# Allegro board VA73120_CPTest_Borad_v1.0_20221226_0800.brd
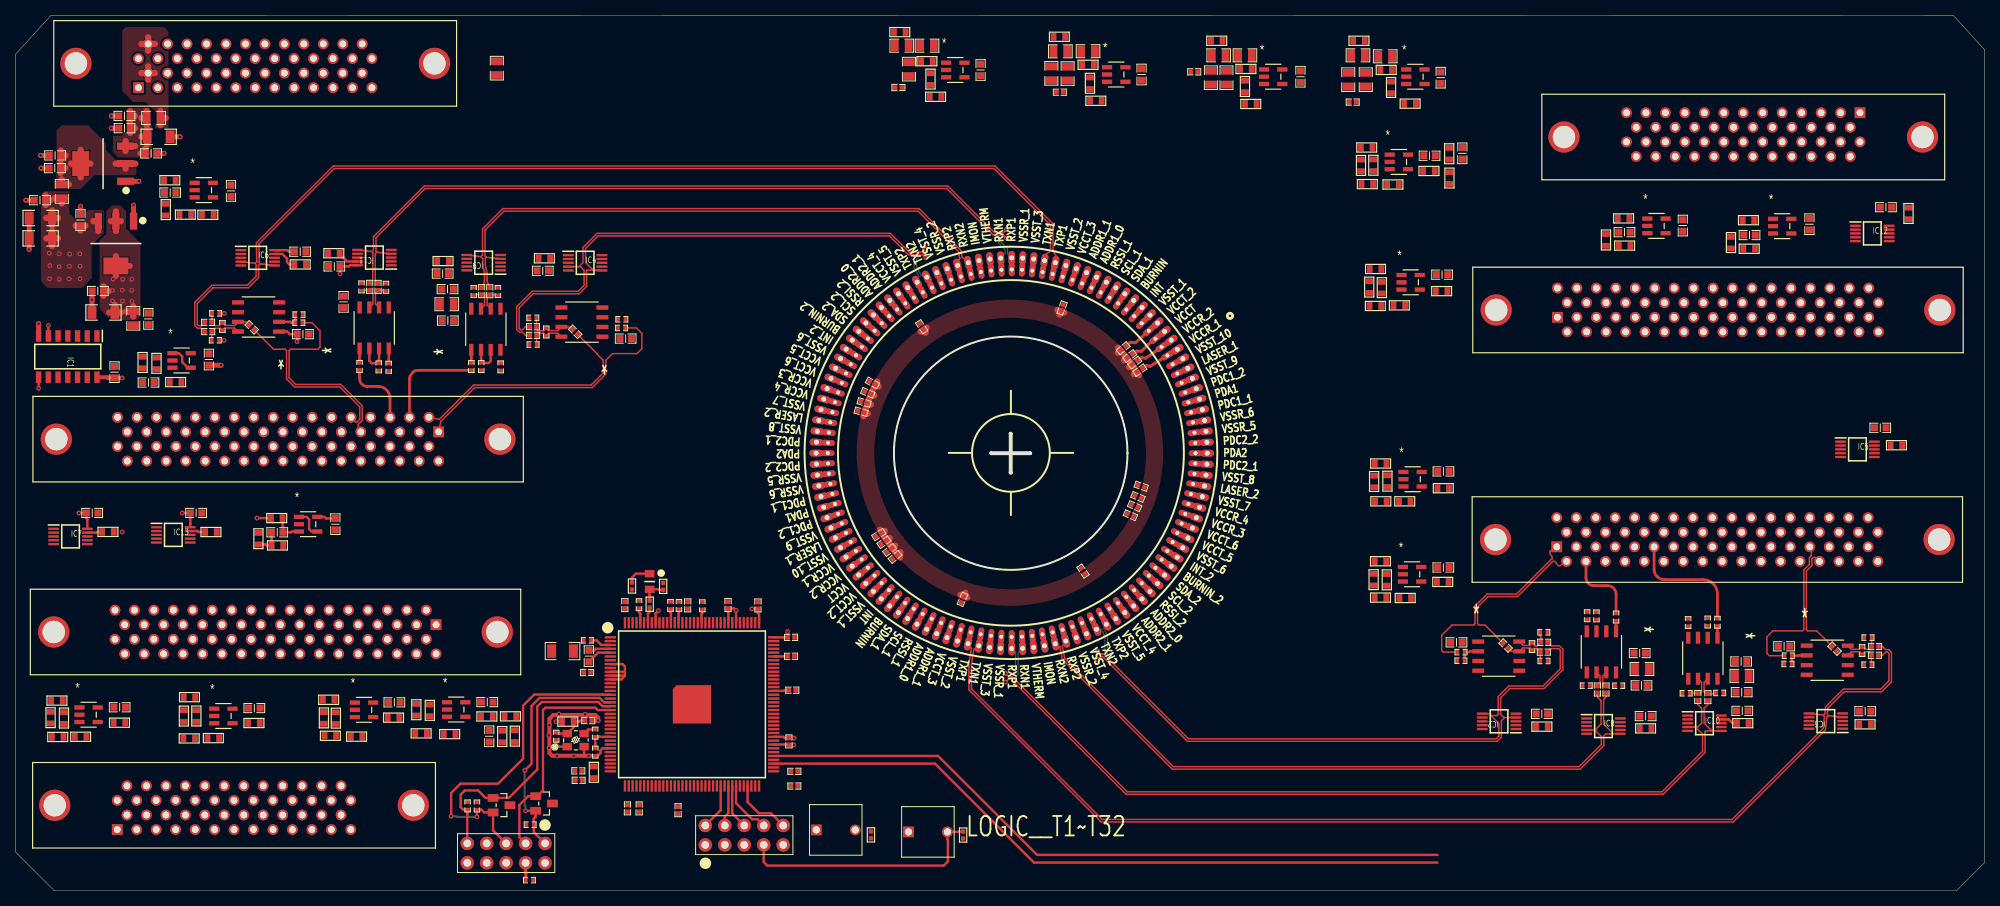
[diagram p0: board, top side]
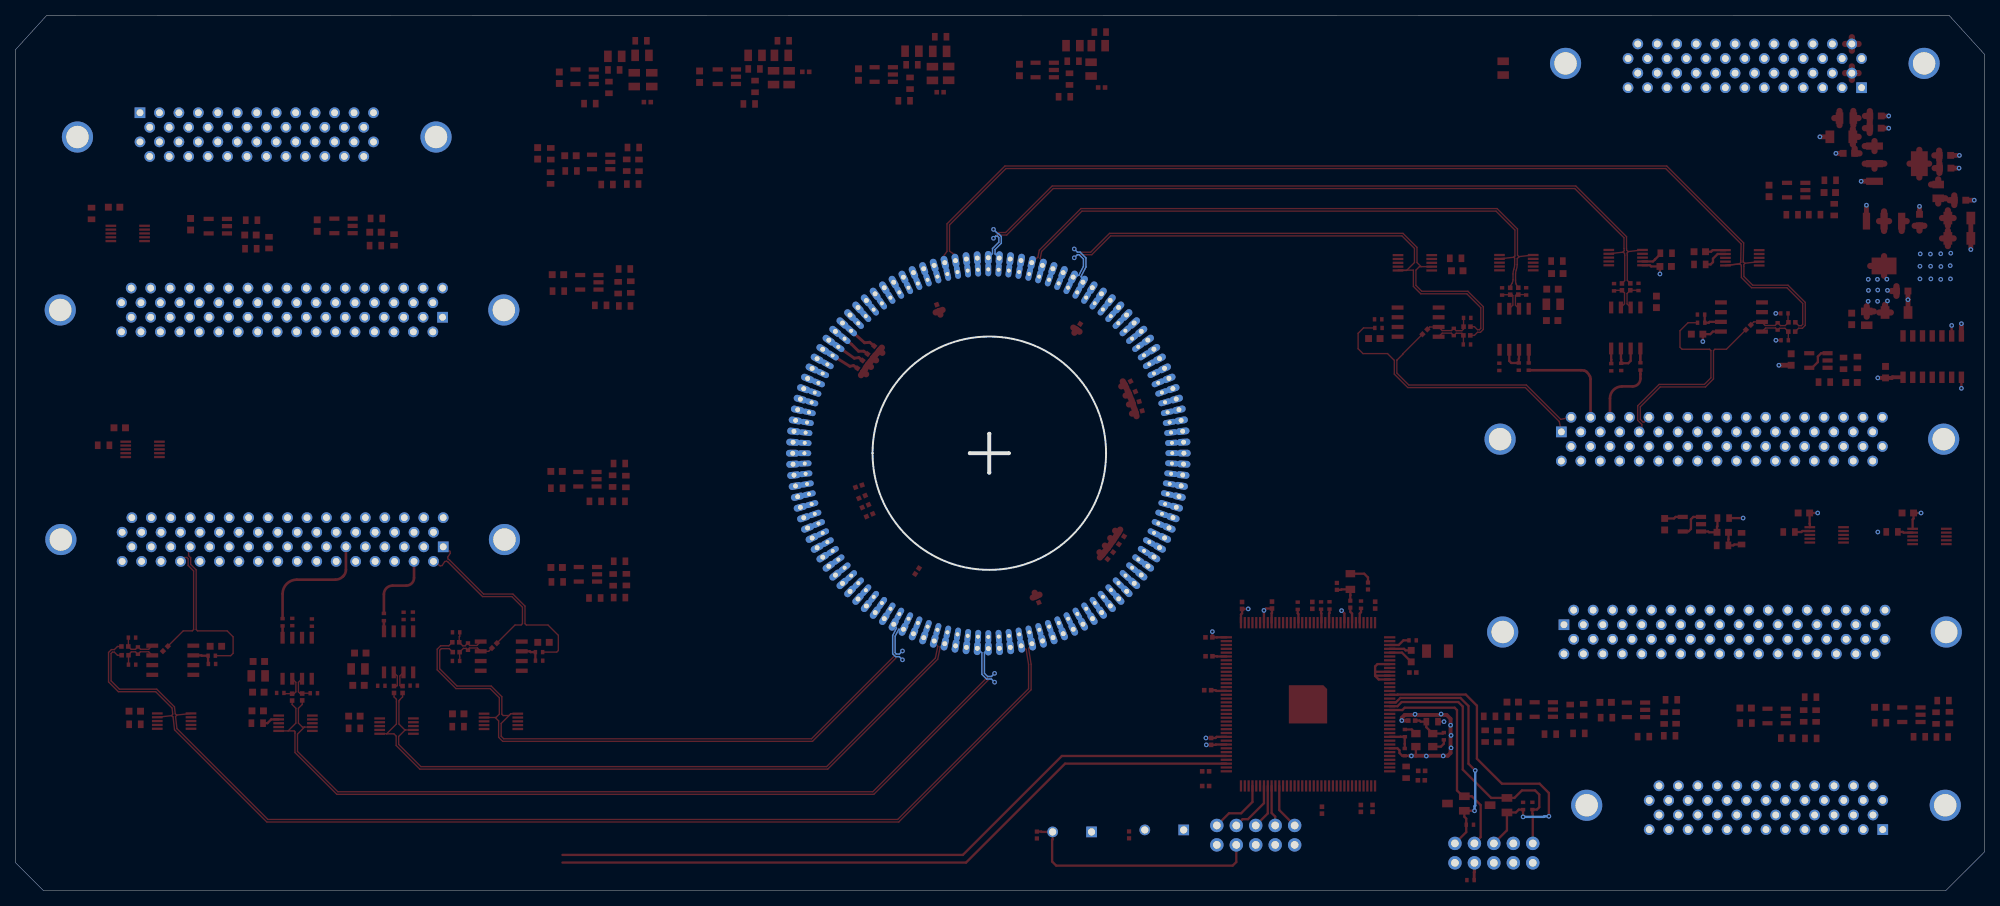
[diagram p1: board, bottom side, seen from below]

Outline 257.05 x 114.35 mm; copper layers: TOP, GND, PWR, BOTTOM. Coordinates in mm from the lower left corner of the outline.
Outline path: 127.38,57.15 132.46,57.15 ; 129.92,54.61 129.92,59.69 ; 0,109.24 4.65,114.35 252.99,114.3 257.05,109.84 257.05,3.68 253.36,0 5.08,0 0,5.08 0,109.24 ; 114.62,57.15 arc(114.68,57.21) 114.74,57.15 arc(114.68,57.09) 114.62,57.15 ; 114.68,57.15 arc(129.92,72.39) 145.16,57.15 arc(129.92,41.91) 114.68,57.15 ; 127.25,57.15 arc(127.38,57.28) 127.51,57.15 arc(127.38,57.02) 127.25,57.15 ; 129.79,59.69 arc(129.92,59.82) 130.05,59.69 arc(129.92,59.56) 129.79,59.69 ; 129.79,54.61 arc(129.92,54.74) 130.05,54.61 arc(129.92,54.48) 129.79,54.61 ; 132.33,57.15 arc(132.46,57.28) 132.59,57.15 arc(132.46,57.02) 132.33,57.15 ; 145.1,57.15 arc(145.16,57.21) 145.22,57.15 arc(145.16,57.09) 145.1,57.15

## Design rules (mm)
constraint set DEFAULT: min track width 0.305
net group CP_RX1_DP0: nets N15137497 N15137501
net group CP_RX1_DP1: nets RXN1 RXP1
net group CP_RX2_DP0: nets N15137201 N15137205
net group CP_RX2_DP1: nets RXN2 RXP2
net group CP_TX1_DP0: nets N15195583 N15195587
net group CP_TX1_DP1: nets CP_TXN1 CP_TXP1
net group CP_TX1_DP2: nets TXN1 TXP1
net group CP_TX2_DP0: nets N15197032 N15197047
net group CP_TX2_DP1: nets CP_TXN2 CP_TXP2
net group CP_TX2_DP2: nets TXN2 TXP2
net group SET2_RX1_DP0: nets N15135903 N15135907
net group SET2_RX1_DP1: nets SET2_RXN1 SET2_RXP1
net group SET2_RX2_DP0: nets N15136181 N15136185
net group SET2_RX2_DP1: nets SET2_RXN2 SET2_RXP2
net group SET2_TX1_DP0: nets N15195359 N15195363
net group SET2_TX1_DP1: nets SET2_CP_TXN1 SET2_CP_TXP1
net group SET2_TX1_DP2: nets SET2_TXN1 SET2_TXP1
net group SET2_TX2_DP0: nets N15196799 N15196810
net group SET2_TX2_DP1: nets SET2_CP_TXN2 SET2_CP_TXP2
net group SET2_TX2_DP2: nets SET2_TXN2 SET2_TXP2
net group DANDUAN_LINE_CLASS: nets RX1 RX2 SET2_RX1 SET2_RX2

## Placement (name value [footprint] x y rotation side)
C3  0.1uF  [CAP0402]  67.59 72.54 0 top
C4  0.1uf  [CAP0603]  12.94 67.74 270 top
C6  0.1uF  [CAP0402]  67.57 73.68 0 top
C7  47uf  [CAP1206]  3.31 85.21 180 top
C8  0.1uF  [CAP0402]  25.16 74.25 0 top
C9  0.1uF  [CAP0402]  25.18 73.03 0 top
C10  0.1uF  [CAP0402]  207.62 26.28 90 top
C11  0.1uF  [CAP0402]  206.5 26.28 90 top
C12  0.1uf  [CAP0603]  14.25 99.61 0 top
C13  0.1uf  [CAP0603]  3.22 90.2 180 top
C14  0.1uF  [CAP0402]  199.56 32.45 180 top
C15  0.1uF  [CAP0402]  199.51 31.16 180 top
C18  0.1uF  [CAP0402]  242.75 31.9 180 top
C19  0.1uF  [CAP0402]  242.72 30.76 180 top
C20  0.1uf  [CAP0603]  199.24 23.1 0 top
C22  0.1uf  [CAP0603]  125.99 107.21 90 top
C23  0.1uf  [CAP0603]  241.46 23.45 0 top
C24  0.1uf  [CAP0603]  186.04 106.2 90 top
C26  0.1uf  [CAP0603]  167.73 106.33 90 top
C27  0.1uf  [CAP0603]  68.84 80.98 180 top
C29  0.1uf  [CAP0603]  243.42 60.47 0 top
C30  0.1uF  [CAP0402]  174.56 103.01 0 top
C32  0.1uF  [CAP0402]  153.88 106.97 0 top
C33  0.1uf  [CAP0603]  37.19 83.47 0 top
C34  0.1uF  [CAP0402]  101.68 15.59 0 top
C35  0.1uf  [CAP0603]  147 106.62 90 top
C36  47uf  [CAP1206]  18.71 98.48 0 top
C37  0.1uf  [CAP0603]  17.72 96.32 0 top
C38  0.1uf  [CAP0603]  10.03 49.34 0 top
C39  0.1uf  [CAP0603]  5.19 96.05 180 top
C40  10uF  [CAP0603]  5.15 94.39 180 top
C41  0.1uF  [CAP0402]  115.26 104.92 180 top
C42  0.1uF  [CAP0402]  136.33 104.31 0 top
C43  10nf  [CAP0402]  96.93 37.26 90 top
C44  0.1uf  [CAP0603]  28.15 91.41 90 top
C45  10nf  [CAP0402]  100.97 19.5 270 top
C46  10nf  [CAP0402]  79.9 10.75 270 top
C47  0.1uf  [CAP0603]  226.36 85.65 0 top
C48  0.1uf  [CAP0603]  17.38 66.38 0 top
C49  0.1uf  [CAP0603]  210.04 86.02 0 top
C50  0.1uf  [CAP0603]  234.17 87.06 90 top
C51  0.1uf  [CAP0603]  25.26 69.39 90 top
C52  0.1uf  [CAP0603]  217.64 86.89 90 top
C53  0.1uf  [CAP0603]  212.79 22.8 0 top
C54  0.1uf  [CAP0603]  55.78 80.62 180 top
C56  0.1uf  [CAP0603]  225.41 23.49 0 top
C57  0.1uf  [CAP0603]  41.64 81.55 180 top
C58  0.1uf  [CAP0603]  244.16 89.29 180 top
C59  0.1uf  [CAP0603]  23.6 49.34 0 top
C60  0.1uf  [CAP0603]  34.19 46.82 0 top
C61  0.1uf  [CAP0603]  41.77 47.88 90 top
C62  0.1uf  [CAP0603]  212.02 31.04 0 top
C65  0.1uF  [CAP0402]  146.76 67.99 34.4 top
C66  0.1uF  [CAP0402]  146.11 68.99 37.4 top
C67  0.1uF  [CAP0402]  145.45 69.84 36.4 top
C68  0.1uF  [CAP0402]  144.6 70.86 39.9 top
C69  0.1uF  [CAP0402]  136.62 76.13 70 top
C70  0.1uF  [CAP0402]  118.3 73.66 123.4 top
C71  0.1uF  [CAP0402]  111.88 66.32 151.5 top
C72  0.1uF  [CAP0402]  111.27 65.03 157.7 top
C73  0.1uF  [CAP0402]  110.79 63.78 164 top
C74  0.1uF  [CAP0402]  110.4 62.56 164.6 top
C75  0.1uf  [CAP0603]  225.26 29.94 0 top
C76  0.1uF  [CAP0402]  219.6 25.31 90 top
C77  0.1uF  [CAP0402]  220.92 25.29 90 top
C78  0.1uf  [CAP0603]  56.45 74.48 180 top
C79  0.1uF  [CAP0402]  61.93 78.31 270 top
C80  0.1uF  [CAP0402]  60.87 78.32 270 top
C81  0.1uf  [CAP0603]  42.84 76.92 90 top
C82  0.1uF  [CAP0402]  47.35 78.88 270 top
C83  0.1uF  [CAP0402]  46.25 78.89 270 top
C84  0.1uF  [CAP0402]  112.71 46.52 212.1 top
C85  0.1uF  [CAP0402]  113.38 45.52 215.3 top
C86  0.1uF  [CAP0402]  114.11 44.5 218.5 top
C87  0.1uF  [CAP0402]  114.83 43.6 220.1 top
C88  0.1uF  [CAP0402]  123.63 38.06 246.8 top
C89  0.1uF  [CAP0402]  139.35 41.75 303.7 top
C90  0.1uF  [CAP0402]  145.54 49.05 336.4 top
C91  0.1uF  [CAP0402]  146.09 50.24 336.2 top
C92  0.1uF  [CAP0402]  146.53 51.44 336.5 top
C93  0.1uF  [CAP0402]  146.95 52.84 340.7 top
C98  0.1uf  [CAP0603]  8.51 87.61 90 top
C99  0.1uf  [CAP0603]  10.76 78.34 180 top
C100  10uF  [CAP0603]  17.36 74.69 90 top
C101  47uf  [CAP1206]  11.5 75.53 180 top
C102  47uf  [CAP1206]  3.31 87.87 180 top
C103  10uF  [CAP0603]  56.41 78.58 180 top
C104  10uF  [CAP0603]  14.24 101.2 0 top
C105  10uF  [CAP0603]  225.33 25.93 0 top
C106  10uF  [CAP0603]  212.25 26.82 0 top
C107  0.1uF  [CAP0402]  237.46 31.62 135 top
C108  0.1uF  [CAP0402]  194.52 32.02 135 top
C109  0.1uF  [CAP0402]  30.84 73.59 315 top
C110  0.1uF  [CAP0402]  73.07 73.01 315 top
C111  0.1uf  [CAP0603]  79.67 72.13 0 top
C112  0.1uf  [CAP0603]  37.54 72.7 0 top
C113  0.1uf  [CAP0603]  188.11 32.44 180 top
C114  0.1uf  [CAP0603]  230.87 31.93 180 top
C115  10uF  [CAP0603]  188.87 96.32 90 top
C116  0.1uf  [CAP0603]  186.39 42.22 0 top
C117  0.1uf  [CAP0603]  184.59 96.01 0 top
C118  0.1uf  [CAP0603]  186.22 80.47 0 top
C119  0.1uf  [CAP0603]  186.4 54.77 0 top
C120  0.1uf  [CAP0603]  20.22 91.2 0 top
C121  0.1uf  [CAP0603]  49.47 24.6 0 top
C122  0.1uf  [CAP0603]  61.6 24.64 0 top
C123  0.1uf  [CAP0603]  31.2 23.86 0 top
C124  0.1uf  [CAP0603]  13.62 23.96 0 top
C125  10uF  [CAP0603]  61.86 20.17 270 top
C126  0.1uF  [CAP0402]  74.79 22.22 0 top
C127  10uf  [CAP0603]  74.85 30.64 90 top
C128  0.1uF  [CAP0402]  79.56 37.3 90 top
C129  0.1uF  [CAP0402]  74.63 28.5 180 top
C130  0.1uF  [CAP0402]  87.76 37.27 90 top
C131  0.1uF  [CAP0402]  93.02 37.31 90 top
C132  0.1uF  [CAP0402]  101.68 13.67 0 top
C133  0.1uF  [CAP0402]  73.53 14.42 180 top
C134  0.1uF  [CAP0402]  101.26 33.09 0 top
C135  10nf  [CAP0402]  86.5 10.52 270 top
C136  10nf  [CAP0402]  81.43 10.75 270 top
C137  10nf  [CAP0402]  73.49 15.65 180 top
C138  10nf  [CAP0402]  101.42 26.19 0 top
C139  10nf  [CAP0402]  101.24 30.62 0 top
D1  LED0603  [LEDSC0805]  82.79 40.39 270 top
D2  SM05T1  [SOT23]  69.02 11.39 270 top
D3  SM05T1  [SOT23]  63.46 11.17 270 top
IC1  74VHC08MX  [SOIC127P600X175-14N]  6.85 69.77 270 top
IC2  -  [SOP50P490X110-10N]  193.67 22.12 180 top
IC3  -  [SOP50P490X110-10N]  236.32 22.15 180 top
IC4  -  [SOP50P490X110-10N]  74.37 82.02 0 top
IC5  -  [SOP50P490X110-10N]  240.44 57.65 0 top
IC6  -  [SOP50P490X110-10N]  31.63 82.67 0 top
IC7  -  [SOP50P490X110-10N]  7.21 46.28 0 top
IC8  -  [SOP50P490X110-10N]  207.29 21.5 0 top
IC9  -  [SOP50P490X110-10N]  61.13 82.04 180 top
IC10  -  [SOP50P490X110-10N]  220.48 21.87 0 top
IC11  -  [SOP50P490X110-10N]  46.86 82.7 180 top
IC12  -  [SOP50P490X110-10N]  242.38 85.86 0 top
IC13  -  [SOP50P490X110-10N]  20.62 46.48 0 top
J1  SCSI 1-2  [DBSCSI-STN68P-P127-180]  34.3 58.98 0 top
J2  SCSI 1-3  [DBSCSI-STN50P-P127-180]  225.54 98.45 0 top
J3  SCSI 1-1  [DBSCSI-STN68P-P127-180]  33.96 33.79 0 top
J4  SCSI 2-3  [DBSCSI-STN50P-P127-180]  28.55 11.16 180 top
J5  SCSI 2-2  [DBSCSI-STN68P-P127-180]  222.15 45.87 180 top
J6  SCSI 7-3  [DBSCSI-STN50P-P127-180]  31.31 108.07 180 top
J7  SCSI 2-1  [DBSCSI-STN68P-P127-180]  222.24 75.86 180 top
J8  JTAG 2.54mm  [HEADER254-10PDIP]  69.14 6.18 180 top
J10  HEADER 5X2  [HEADER254-10PDIP]  90.06 5.98 0 top
L1  BLM21PG221SN1  [IND0805]  62.85 107.45 90 top
L2  BLM21PG221SN1  [IND0805]  173.98 105.95 90 top
L3  BLM21PG221SN1  [IND0805]  156.05 106.2 90 top
L4  BLM21PG221SN1  [IND0805]  116.64 107.32 270 top
L5  BLM21PG221SN1  [IND0805]  158.08 106.2 270 top
L6  BLM21PG221SN1  [IND0805]  176.26 105.95 270 top
L7  10uH  [IND0805]  115.7 110.38 180 top
L8  10uH  [IND0805]  157.07 109.12 180 top
L9  10uH  [IND0805]  119 110.38 180 top
L10  10uH  [IND0805]  175.25 109.12 180 top
L11  10uH  [IND0805]  160.5 109.12 180 top
L12  10uH  [IND0805]  178.8 109 180 top
L13  BLM21PG221SN1  [IND0805]  135.23 106.77 90 top
L14  BLM21PG221SN1  [IND0805]  137.35 106.75 270 top
L15  10uH  [IND0805]  136.4 109.65 180 top
L16  10uH  [IND0805]  140.01 109.67 180 top
L17  BLM21PG221SN1  [IND0805]  6.07 91.35 270 top
L18  BLM21PG221SN1  [IND0805]  15.39 74.77 270 top
L19  BLM21PG221SN1  [IND0805]  56.32 76.61 0 top
L20  BLM21PG221SN1  [IND0805]  225.35 28.06 180 top
L21  BLM21PG221SN1  [IND0805]  212.32 28.97 180 top
L22  BLM21PG221SN1  [IND0805]  18.05 100.93 0 top
L23  BLM21PG221SN1  [RES0603]  75.52 15.47 90 top
L24  BLM21PG221SN1  [RES0603]  72.11 22.08 180 top
P1  10M08SA E144  [QFP50P2200X2200-145N]  88.32 24.35 0 top
R1  150R  [RES0603]  199.25 21.43 180 top
R2  150R  [RES0603]  115.44 112.16 0 top
R3  150R  [RES0603]  156.81 111.03 0 top
R4  150R  [RES0603]  175.38 111.03 0 top
R5  150R  [RES0603]  118.98 108.36 180 top
R6  10K  [RES0603]  120.12 103.71 0 top
R7  150R  [RES0603]  160.62 107.35 180 top
R8  150R  [RES0603]  178.93 107.22 180 top
R9  150R  [RES0603]  241.43 21.74 180 top
R10  10K  [RES0603]  161.26 102.77 0 top
R11  10K  [RES0603]  182.05 102.82 0 top
R12  12K  [RES0603]  119.45 106.02 270 top
R13  12K  [RES0603]  160.5 105.06 270 top
R14  12K  [RES0603]  179.57 104.93 270 top
R15  150R  [RES0603]  69.05 82.61 0 top
R16  150R  [RES0603]  245.53 58.19 180 top
R17  150R  [RES0603]  136.27 111.55 0 top
R18  150R  [RES0603]  37.18 81.81 180 top
R19  150R  [RES0603]  140.01 107.89 180 top
R20  10K  [RES0603]  141.03 103.19 0 top
R21  12K  [RES0603]  140.27 105.48 270 top
R22  150R  [RES0603]  12.09 46.87 180 top
R23  3K  [RES0603]  25.13 88.3 0 top
R26  1K  [RES0603]  22.19 88.31 0 top
R27  4.7K  [RES0402]  70.59 20.18 270 top
R28  33  [RES0402]  75.68 20.58 90 top
R29  60R  [RES0603]  19.64 88.97 270 top
R30  120  [RES0402]  75.7 18.1 90 top
R31  27K  [RES0603]  20.93 66.44 0 top
R36  150R  [RES0603]  212.79 21.21 180 top
R37  150R  [RES0603]  55.82 82.25 0 top
R39  150R  [RES0603]  225.47 21.88 180 top
R41  150R  [RES0603]  41.57 83.27 0 top
R43  150R  [RES0603]  247.1 88.47 270 top
R44  150R  [RES0603]  25.53 46.85 180 top
R45  100R  [RES0603]  31.73 45.98 90 top
R46  NC  [RES0603]  34.21 45.11 0 top
R47  100R  [RES0603]  16.61 69 90 top
R48  NC  [RES0603]  18.42 68.89 90 top
R49  100R  [RES0603]  207.62 85.01 90 top
R50  NC  [RES0603]  210.05 84.27 0 top
R51  100R  [RES0603]  223.94 84.66 90 top
R52  NC  [RES0603]  226.31 83.86 0 top
R53  100R  [RES0402]  205.16 35.92 90 top
R54  50R  [RES0402]  205.05 26.79 0 top
R55  50R  [RES0402]  209.27 26.77 180 top
R56  22R  [RES0402]  208.94 35.75 90 top
R57  100R  [RES0402]  206.37 35.9 90 top
R58  50R  [RES0402]  222.46 25.83 180 top
R59  50R  [RES0402]  218.08 25.8 0 top
R60  22R  [RES0402]  222.16 35.06 90 top
R61  100R  [RES0402]  220.9 35.1 90 top
R62  100R  [RES0402]  218.34 35.02 90 top
R63  50R  [RES0402]  59.84 78.29 270 top
R64  50R  [RES0402]  62.99 78.28 270 top
R65  22R  [RES0402]  59.52 68.47 270 top
R66  100R  [RES0402]  60.81 68.47 270 top
R67  100R  [RES0402]  63.35 68.43 270 top
R68  50R  [RES0402]  45.19 78.87 270 top
R69  50R  [RES0402]  48.38 78.83 270 top
R70  22R  [RES0402]  44.93 68.49 270 top
R71  100R  [RES0402]  47.44 68.42 270 top
R72  100R  [RES0402]  48.74 68.38 270 top
R73  NC  [RES0402]  241.82 33.06 0 top
R74  50R  [RES0402]  241.05 31.37 90 top
R75  NC  [RES0402]  241.8 29.53 0 top
R76  NC  [RES0402]  199.51 33.75 180 top
R77  50R  [RES0402]  197.96 31.89 90 top
R78  NC  [RES0402]  199.52 30.01 180 top
R79  NC  [RES0402]  67.58 71.35 0 top
R80  50R  [RES0402]  69.3 72.99 270 top
R81  NC  [RES0402]  67.55 74.83 0 top
R82  NC  [RES0402]  26.1 71.9 180 top
R83  50R  [RES0402]  27.02 73.72 270 top
R84  NC  [RES0402]  26.14 75.42 180 top
R146  NC  [RES0603]  179.02 40.61 270 top
R149  1K  [RES0603]  178.19 38.29 180 top
R150  100K  [RES0603]  181.41 38.24 180 top
R151  NC  [RES0603]  178.36 78.77 270 top
R152  1K  [RES0603]  177.51 76.38 180 top
R153  100K  [RES0603]  180.65 76.46 180 top
R154  100R  [RES0603]  186.17 78.32 0 top
R155  NC  [RES0603]  179.09 53.5 270 top
R156  1K  [RES0603]  178.23 50.86 180 top
R157  100K  [RES0603]  181.35 50.87 180 top
R159  NC  [RES0603]  177.25 94.77 270 top
R160  1K  [RES0603]  176.47 92.31 180 top
R161  100K  [RES0603]  179.81 92.25 180 top
R162  100R  [RES0603]  184.51 94.02 0 top
R163  100R  [RES0603]  186.31 40.34 0 top
R164  100R  [RES0603]  186.38 52.58 0 top
R165  10K  [RES0603]  187.18 93.1 270 top
R166  100R  [RES0603]  187.16 96.27 270 top
R167  22R  [RES0603]  178.18 43.03 0 top
R168  22R  [RES0603]  177.36 53.45 90 top
R169  22R  [RES0603]  177.54 81.22 0 top
R170  22R  [RES0603]  176.39 97.08 0 top
R171  100R  [RES0603]  20.16 92.81 180 top
R172  27K  [RES0603]  209.92 87.82 180 top
R173  27K  [RES0603]  226.21 87.59 180 top
R174  27K  [RES0603]  34.12 48.68 180 top
R175  NC  [RES0603]  41.84 22.54 270 top
R176  22R  [RES0603]  41.12 20.23 180 top
R177  22R  [RES0603]  40.89 24.94 0 top
R178  10K  [RES0603]  44.54 20.12 180 top
R179  100R  [RES0603]  49.36 22.6 0 top
R180  NC  [RES0603]  54.1 23.56 270 top
R181  22R  [RES0603]  52.96 20.55 180 top
R183  10K  [RES0603]  56.69 20.45 180 top
R184  100R  [RES0603]  61.55 22.76 0 top
R185  NC  [RES0603]  23.63 22.82 270 top
R186  22R  [RES0603]  22.69 19.89 180 top
R187  22R  [RES0603]  22.73 25.28 0 top
R188  10K  [RES0603]  25.84 19.93 180 top
R189  100R  [RES0603]  31.14 21.9 0 top
R190  NC  [RES0603]  6.35 22.55 270 top
R191  22R  [RES0603]  5.54 20.08 180 top
R192  22R  [RES0603]  5.43 24.83 0 top
R193  10K  [RES0603]  8.52 20.11 180 top
R194  100R  [RES0603]  13.59 21.94 0 top
R195  3K  [RES0603]  64.62 22.78 0 top
R196  3K  [RES0603]  63.55 20.14 90 top
R197  60R  [RES0603]  65.2 20.19 270 top
R198  330  [0402]  84.56 39.75 270 top
R199  0R  [0402]  82.8 37.43 90 top
R200  330  [0402]  80.49 39.8 270 top
R209  0  [RES1206]  71.42 31.3 0 top
R210  10k  [RES0402]  60.25 11.07 270 top
R211  10k  [RES0402]  59.04 11.07 270 top
R212  10k  [RES0402]  67.11 1.38 0 top
R213  10  [RES0402]  74.67 32.7 0 top
R214  2K  [RES0402]  67.2 8.62 180 top
R215  4.7K  [0402]  111.68 7.29 90 top
R216  4.7K  [0402]  123.71 7.27 90 top
R224  22R  [RES0603]  176.72 78.85 90 top
R225  22R  [RES0603]  175.64 94.75 90 top
R226  22R  [RES0603]  178.2 55.8 0 top
R227  22R  [RES0603]  177.29 40.63 90 top
R228  22R  [RES0603]  52.34 23.64 90 top
R229  22R  [RES0603]  22 22.82 90 top
R230  22R  [RES0603]  4.6 22.61 90 top
R231  22R  [RES0603]  40.28 22.57 90 top
R232  22R  [RES0402]  188.69 31.17 180 top
R233  22R  [RES0402]  188.68 30.05 180 top
R234  22R  [RES0402]  231.37 29.62 180 top
R235  22R  [RES0402]  231.41 30.7 180 top
R236  22R  [RES0402]  79.16 74.64 0 top
R237  22R  [RES0402]  79.13 73.51 0 top
R238  22R  [RES0402]  37 74.19 0 top
R239  22R  [RES0402]  37.02 75.26 0 top
R240  22R  [RES0402]  86.62 37.25 270 top
R241  22R  [RES0402]  89.67 37.22 270 top
R242  22R  [RES0402]  85.52 37.26 270 top
R243  22R  [RES0402]  81.4 37.36 270 top
SW1  -  [EVQ-11L07K]  104.55 7.94 0 top
SW2  -  [EVQ-11L07K]  116.57 7.68 0 top
U2  OP  [SOT23-5_STM]  122.69 107.21 0 top
U3  OP  [SOT23-5_STM]  164.18 106.33 0 top
U4  OP  [SOT23-5_STM]  182.74 106.33 0 top
U5  LT1117/LM1117  [SOT223-4N]  11.45 94.97 180 top
U6  OP  [SOT23-5_STM]  143.7 106.62 0 top
U7  OP356  [SOT23-5_STM]  24.6 91.52 0 top
U10  OP356  [SOT23-5_STM]  21.7 69.26 0 top
U11  OP356  [SOT23-5_STM]  214.21 86.84 0 top
U12  OP356  [SOT23-5_STM]  230.62 86.81 0 top
U14  OP356  [SOT23-5_STM]  38.22 47.88 0 top
U15  SG73120  [VA7632B_C]  130.05 57.15 270 top
U16  SM65MLVD202AD  [SO-8_STM]  207.02 31.2 270 top
U17  SM65MLVD202AD  [SO-8_STM]  220.26 30.37 270 top
U18  SM65MLVD202AD  [SO-8_STM]  61.42 73.34 90 top
U19  SM65MLVD202AD  [SO-8_STM]  46.84 73.51 90 top
U24  LT1117/LM1117_1V8  [SOT223-4N]  13.13 84.54 270 top
U25  DS90LV017A  [SO-8_STM]  236.5 30.1 0 top
U26  DS90LV017A  [SO-8_STM]  193.63 30.64 0 top
U27  DS90LV017A  [SO-8_STM]  73.95 74.27 180 top
U28  DS90LV017A  [SO-8_STM]  31.74 74.94 180 top
U29  LMV7219  [SOT23-5_STM]  182.31 41.33 0 top
U30  LMV7219  [SOT23-5_STM]  182.13 79.47 0 top
U31  LMV7219  [SOT23-5_STM]  182.38 53.75 0 top
U32  LMV7219  [SOT23-5_STM]  180.58 95.2 0 top
U33  LMV7219  [SOT23-5_STM]  45.51 23.62 0 top
U34  LMV7219  [SOT23-5_STM]  57.55 23.66 0 top
U35  LMV7219  [SOT23-5_STM]  27.16 22.82 0 top
U36  LMV7219  [SOT23-5_STM]  9.56 22.99 0 top
U37  OSC_50MHz  [SMD_3225]  73.17 19.64 0 top

## Library data of the parts
C3 C4 C6 C8-C15 C18-C20 C22-C24 C26 C27 C29 C30 C32-C35 C37-C54 C56-C62 C65-C93 C98-C100 C103-C126 C128-C139 = CAP NP
C7 C36 C101 C102 C127 = CAPACITOR NON-POL
D1 = LED
D2 D3 = SM05T1
IC1 = 74VHC08MX
IC2-IC13 = TMUX154EDGSR_SOP50P490X110-10N_
J1 J3 J5 J7 = CON EISA62_5
J2 J4 J6 = CON50A_7
J8 J10 = HEADER 5X2
L1-L24 = INDUCTOR
P1 = 10M08SA E144_3
R1-R23 R26-R31 R36 R37 R39 R41 R43-R52 R165 R166 R171-R174 R195-R200 R215 R216 = R
R53-R84 R146 R149-R157 R159-R164 R167-R170 R175-R181 R183-R194 R209-R214 R224-R243 = RESISTOR
SW1 SW2 = SW PUSHBUTTON
U2-U4 U6 U7 U10-U12 U14 = OPA356_0: Tolerance: TOL; User Part Number: PN
U5 U24 = LT1117-3_1.3/SO
U15 = SG73120
U16-U19 = DS36F95/SO_0: Tolerance: TOL; User Part Number: PN
U25-U28 = MC1733_2: Tolerance: TOL; User Part Number: PN
U29-U36 = OPA356_1: Tolerance: TOL; User Part Number: PN
U37 = OSC

## Footprints (pads in the part's own frame, mm; a bottom-side part is the same pattern mirrored in y, then rotated)
0402
  rect 0.551x0.551 smd: 1(-0.45,0) 2(0.45,0)
CAP0402
  rect 0.6x0.6 smd: 1(-0.45,0) 2(0.45,0)
CAP0603
  rect 0.9x0.9 smd: 1(-0.75,0) 2(0.75,0)
CAP1206
  rect 1.15x1.65 smd: 1(-1.5,0) 2(1.5,0)
DBSCSI-STN50P-P127-180
  rect 1.397x1.397 hole 0.889: 1(15.24,3.175)
  round 1.397 hole 0.889: 2(13.97,1.27) 3(12.7,3.175) 4(11.43,1.27) 5(10.16,3.175) 6(8.89,1.27) 7(7.62,3.175) 8(6.35,1.27) 9(5.08,3.175) 10(3.81,1.27) 11(2.54,3.175) 12(1.27,1.27) 13(0,3.175) 14(-1.27,1.27) 15(-2.54,3.175) 16(-3.81,1.27) 17(-5.08,3.175) 18(-6.35,1.27) 19(-7.62,3.175) 20(-8.89,1.27) 21(-10.16,3.175) 22(-11.43,1.27) 23(-12.7,3.175) 24(-13.97,1.27) 25(-15.24,3.175) 26(15.24,-0.635) 27(13.97,-2.54) 28(12.7,-0.635) 29(11.43,-2.54) 30(10.16,-0.635) 31(8.89,-2.54) 32(7.62,-0.635) 33(6.35,-2.54) 34(5.08,-0.635) 35(3.81,-2.54) 36(2.54,-0.635) 37(1.27,-2.54) 38(0,-0.635) 39(-1.27,-2.54) 40(-2.54,-0.635) 41(-3.81,-2.54) 42(-5.08,-0.635) 43(-6.35,-2.54) 44(-7.62,-0.635) 45(-8.89,-2.54) 46(-10.16,-0.635) 47(-11.43,-2.54) 48(-12.7,-0.635) 49(-13.97,-2.54) 50(-15.24,-0.635)
  round 4.064 hole 2.921: N1(-23.4,0) N2(23.4,0)
DBSCSI-STN68P-P127-180
  rect 1.397x1.397 hole 0.889: 1(20.955,0.953)
  round 1.397 hole 0.889: 2(19.685,2.857) 3(18.415,0.953) 4(17.145,2.857) 5(15.875,0.953) 6(14.605,2.857) 7(13.335,0.953) 8(12.065,2.857) 9(10.795,0.953) 10(9.525,2.857) 11(8.255,0.953) 12(6.985,2.857) 13(5.715,0.953) 14(4.445,2.857) 15(3.175,0.953) 16(1.905,2.857) 17(0.635,0.953) 18(-0.635,2.857) 19(-1.905,0.953) 20(-3.175,2.857) 21(-4.445,0.953) 22(-5.715,2.857) 23(-6.985,0.953) 24(-8.255,2.857) 25(-9.525,0.953) 26(-10.795,2.857) 27(-12.065,0.953) 28(-13.335,2.857) 29(-14.605,0.953) 30(-15.875,2.857) 31(-17.145,0.953) 32(-18.415,2.857) 33(-19.685,0.953) 34(-20.955,2.857) 35(20.955,-2.857) 36(19.685,-0.953) 37(18.415,-2.857) 38(17.145,-0.953) 39(15.875,-2.857) 40(14.605,-0.953) 41(13.335,-2.857) 42(12.065,-0.953) 43(10.795,-2.857) 44(9.525,-0.953) 45(8.255,-2.857) 46(6.985,-0.953) 47(5.715,-2.857) 48(4.445,-0.953) 49(3.175,-2.857) 50(1.905,-0.953) 51(0.635,-2.857) 52(-0.635,-0.953) 53(-1.905,-2.857) 54(-3.175,-0.953) 55(-4.445,-2.857) 56(-5.715,-0.953) 57(-6.985,-2.857) 58(-8.255,-0.953) 59(-9.525,-2.857) 60(-10.795,-0.953) 61(-12.065,-2.857) 62(-13.335,-0.953) 63(-14.605,-2.857) 64(-15.875,-0.953) 65(-17.145,-2.857) 66(-18.415,-0.953) 67(-19.685,-2.857) 68(-20.955,-0.953)
  round 4.064 hole 2.921: M1(-28.95,0) M2(28.95,0)
EVQ-11L07K
  rect 1.397x1.397 hole 0.94: 1(0,0)
  round 1.397 hole 0.94: 2(5.08,0)
HEADER254-10PDIP
  round 1.75 hole 1: 1(0,0) 2(0,2.54) 3(2.54,0) 4(2.54,2.54) 5(5.08,0) 6(5.08,2.54) 7(7.62,0) 8(7.62,2.54) 9(10.16,0) 10(10.16,2.54)
IND0805
  rect 1x1.5 smd: 1(-0.9,0) 2(0.9,0)
LEDSC0805
  rect 0.95x1.25 smd: A(1.025,0) C(-1.025,0)
QFP50P2200X2200-145N
  rect 1.475x0.3 smd: 1(-10.663,8.75) 2(-10.663,8.25) 3(-10.663,7.75) 4(-10.663,7.25) 5(-10.663,6.75) 6(-10.663,6.25) 7(-10.663,5.75) 8(-10.663,5.25) 9(-10.663,4.75) 10(-10.663,4.25) 11(-10.663,3.75) 12(-10.663,3.25) 13(-10.663,2.75) 14(-10.663,2.25) 15(-10.663,1.75) 16(-10.663,1.25) 17(-10.663,0.75) 18(-10.663,0.25) 19(-10.663,-0.25) 20(-10.663,-0.75) 21(-10.663,-1.25) 22(-10.663,-1.75) 23(-10.663,-2.25) 24(-10.663,-2.75) 25(-10.663,-3.25) 26(-10.663,-3.75) 27(-10.663,-4.25) 28(-10.663,-4.75) 29(-10.663,-5.25) 30(-10.663,-5.75) 31(-10.663,-6.25) 32(-10.663,-6.75) 33(-10.663,-7.25) 34(-10.663,-7.75) 35(-10.663,-8.25) 36(-10.663,-8.75) 73(10.663,-8.75) 74(10.663,-8.25) 75(10.663,-7.75) 76(10.663,-7.25) 77(10.663,-6.75) 78(10.663,-6.25) 79(10.663,-5.75) 80(10.663,-5.25) 81(10.663,-4.75) 82(10.663,-4.25) 83(10.663,-3.75) 84(10.663,-3.25) 85(10.663,-2.75) 86(10.663,-2.25) 87(10.663,-1.75) 88(10.663,-1.25) 89(10.663,-0.75) 90(10.663,-0.25) 91(10.663,0.25) 92(10.663,0.75) 93(10.663,1.25) 94(10.663,1.75) 95(10.663,2.25) 96(10.663,2.75) 97(10.663,3.25) 98(10.663,3.75) 99(10.663,4.25) 100(10.663,4.75) 101(10.663,5.25) 102(10.663,5.75) 103(10.663,6.25) 104(10.663,6.75) 105(10.663,7.25) 106(10.663,7.75) 107(10.663,8.25) 108(10.663,8.75)
  rect 0.3x1.475 smd: 37(-8.75,-10.663) 38(-8.25,-10.663) 39(-7.75,-10.663) 40(-7.25,-10.663) 41(-6.75,-10.663) 42(-6.25,-10.663) 43(-5.75,-10.663) 44(-5.25,-10.663) 45(-4.75,-10.663) 46(-4.25,-10.663) 47(-3.75,-10.663) 48(-3.25,-10.663) 49(-2.75,-10.663) 50(-2.25,-10.663) 51(-1.75,-10.663) 52(-1.25,-10.663) 53(-0.75,-10.663) 54(-0.25,-10.663) 55(0.25,-10.663) 56(0.75,-10.663) 57(1.25,-10.663) 58(1.75,-10.663) 59(2.25,-10.663) 60(2.75,-10.663) 61(3.25,-10.663) 62(3.75,-10.663) 63(4.25,-10.663) 64(4.75,-10.663) 65(5.25,-10.663) 66(5.75,-10.663) 67(6.25,-10.663) 68(6.75,-10.663) 69(7.25,-10.663) 70(7.75,-10.663) 71(8.25,-10.663) 72(8.75,-10.663) 109(8.75,10.663) 110(8.25,10.663) 111(7.75,10.663) 112(7.25,10.663) 113(6.75,10.663) 114(6.25,10.663) 115(5.75,10.663) 116(5.25,10.663) 117(4.75,10.663) 118(4.25,10.663) 119(3.75,10.663) 120(3.25,10.663) 121(2.75,10.663) 122(2.25,10.663) 123(1.75,10.663) 124(1.25,10.663) 125(0.75,10.663) 126(0.25,10.663) 127(-0.25,10.663) 128(-0.75,10.663) 129(-1.25,10.663) 130(-1.75,10.663) 131(-2.25,10.663) 132(-2.75,10.663) 133(-3.25,10.663) 134(-3.75,10.663) 135(-4.25,10.663) 136(-4.75,10.663) 137(-5.25,10.663) 138(-5.75,10.663) 139(-6.25,10.663) 140(-6.75,10.663) 141(-7.25,10.663) 142(-7.75,10.663) 143(-8.25,10.663) 144(-8.75,10.663)
  custom 5x5 smd: 145(0,0)
RES0402
  rect 0.46x0.57 smd: 1(-0.475,0) 2(0.475,0)
RES0603
  rect 0.745x0.99 smd: 1(-0.76,0) 2(0.76,0)
RES1206
  rect 1.175x1.75 smd: 1(-1.425,0) 2(1.425,0)
SMD_3225
  rect 1.219x0.965 smd: 1(-1.129,-0.822) 2(1.071,-0.822) 3(1.071,0.878) 4(-1.129,0.878)
SO-8_STM
  rect 1.549x0.559 smd: 1(-2.68,1.905) 2(-2.68,0.635) 3(-2.68,-0.635) 4(-2.68,-1.905) 5(2.68,-1.905) 6(2.68,-0.635) 7(2.68,0.635) 8(2.68,1.905)
SOIC127P600X175-14N
  rect 1.5x0.7 smd: 1(-2.7,3.81) 2(-2.7,2.54) 3(-2.7,1.27) 4(-2.7,0) 5(-2.7,-1.27) 6(-2.7,-2.54) 7(-2.7,-3.81) 8(2.7,-3.81) 9(2.7,-2.54) 10(2.7,-1.27) 11(2.7,0) 12(2.7,1.27) 13(2.7,2.54) 14(2.7,3.81)
SOP50P490X110-10N
  rect 1.4x0.3 smd: 1(-2.2,1) 2(-2.2,0.5) 3(-2.2,0) 4(-2.2,-0.5) 5(-2.2,-1) 6(2.2,-1) 7(2.2,-0.5) 8(2.2,0) 9(2.2,0.5) 10(2.2,1)
SOT23
  rect 1x1.4 smd: 1(-0.95,-1.1) 2(0.95,-1.1) 3(0,1.1)
SOT23-5_STM
  rect 1.321x0.559 smd: 1(-1.194,0.95) 2(-1.194,0) 3(-1.194,-0.95) 4(1.194,-0.95) 5(1.194,0.95)
SOT223-4N
  rect 2.2x0.95 smd: 1(-2.925,2.3) 2(-2.925,0) 3(-2.925,-2.3)
  rect 2.2x3.25 smd: 4(2.925,0)
VA7632B_C
  oval 1.778x0.889 hole 0.635 rot 122.1: 1(-13.577,21.617) 57(13.571,-21.621)
  oval 1.778x0.762 hole 0.508 rot 122.1: 1_1(-12.767,20.326) 1_57(12.761,-20.33)
  oval 1.778x0.762 hole 0.508 rot 125.3: 1_2(-13.886,19.579) 1_58(13.881,-19.582)
  oval 1.778x0.762 hole 0.508 rot 128.6: 1_3(-14.962,18.769)
  oval 1.778x0.762 hole 0.508 rot 131.8: 1_4(-15.991,17.901) 1_60(15.986,-17.905)
  oval 1.778x0.762 hole 0.508 rot 135: 1_5(-16.969,16.976) 1_61(16.964,-16.981)
  oval 1.778x0.762 hole 0.508 rot 138.2: 1_6(-17.894,15.998) 1_62(17.89,-16.003)
  oval 1.778x0.762 hole 0.508 rot 141.4: 1_7(-18.763,14.97) 1_63(18.759,-14.975)
  oval 1.778x0.762 hole 0.508 rot 144.6: 1_8(-19.573,13.894) 1_64(19.569,-13.9)
  oval 1.778x0.762 hole 0.508 rot 147.8: 1_9(-20.321,12.775) 1_65(20.317,-12.781)
  oval 1.778x0.762 hole 0.508 rot 151.1: 1_10(-21.005,11.616)
  oval 1.778x0.762 hole 0.508 rot 154.3: 1_11(-21.624,10.42) 1_67(21.62,-10.426)
  oval 1.778x0.762 hole 0.508 rot 157.5: 1_12(-22.174,9.191) 1_68(22.171,-9.197)
  oval 1.778x0.762 hole 0.508 rot 160.7: 1_13(-22.654,7.933) 1_69(22.652,-7.94)
  oval 1.778x0.762 hole 0.508 rot 163.9: 1_14(-23.063,6.651) 1_70(23.061,-6.657)
  oval 1.778x0.762 hole 0.508 rot 167.1: 1_15(-23.4,5.347) 1_71(23.398,-5.354)
  oval 1.778x0.762 hole 0.508 rot 170.3: 1_16(-23.663,4.027) 1_72(23.662,-4.034)
  oval 1.778x0.762 hole 0.508 rot 173.6: 1_17(-23.851,2.694)
  oval 1.778x0.762 hole 0.508 rot 176.8: 1_18(-23.965,1.353) 1_74(23.964,-1.359)
  oval 1.778x0.762 hole 0.508: 1_19(-24.003,0.007) 1_75(24.003,0)
  oval 1.778x0.762 hole 0.508 rot 3.2: 1_20(-23.966,-1.339) 1_76(23.965,1.346)
  oval 1.778x0.762 hole 0.508 rot 6.4: 1_21(-23.853,-2.68) 1_77(23.852,2.687)
  oval 1.778x0.762 hole 0.508 rot 9.6: 1_22(-23.665,-4.014) 1_78(23.664,4.02)
  oval 1.778x0.762 hole 0.508 rot 12.8: 1_23(-23.403,-5.334)
  oval 1.778x0.762 hole 0.508 rot 16.1: 1_24(-23.067,-6.638) 1_80(23.065,6.644)
  oval 1.778x0.762 hole 0.508 rot 19.3: 1_25(-22.659,-7.921) 1_81(22.656,7.927)
  oval 1.778x0.762 hole 0.508 rot 22.5: 1_26(-22.179,-9.179) 1_82(22.176,9.185)
  oval 1.778x0.762 hole 0.508 rot 25.7: 1_27(-21.629,-10.408) 1_83(21.626,10.414)
  oval 1.778x0.762 hole 0.508 rot 28.9: 1_28(-21.012,-11.604) 1_84(21.009,11.61)
  oval 1.778x0.762 hole 0.508 rot 32.1: 1_29(-20.328,-12.764) 1_85(20.325,12.769)
  oval 1.778x0.762 hole 0.508 rot 35.3: 1_30(-19.581,-13.883)
  oval 1.778x0.762 hole 0.508 rot 38.6: 1_31(-18.771,-14.959) 1_87(18.767,14.964)
  oval 1.778x0.762 hole 0.508 rot 41.8: 1_32(-17.903,-15.988) 1_88(17.899,15.993)
  oval 1.778x0.762 hole 0.508 rot 45: 1_33(-16.979,-16.967) 1_89(16.974,16.972)
  oval 1.778x0.762 hole 0.508 rot 48.2: 1_34(-16.001,-17.892) 1_90(15.996,17.896)
  oval 1.778x0.762 hole 0.508 rot 51.4: 1_35(-14.972,-18.761) 1_91(14.967,18.765)
  oval 1.778x0.762 hole 0.508 rot 54.6: 1_36(-13.897,-19.571) 1_92(13.892,19.575)
  oval 1.778x0.762 hole 0.508 rot 57.8: 1_37(-12.778,-20.319)
  oval 1.778x0.762 hole 0.508 rot 61.1: 1_38(-11.618,-21.004) 1_94(11.613,21.007)
  oval 1.778x0.762 hole 0.508 rot 64.3: 1_39(-10.423,-21.622) 1_95(10.417,21.625)
  oval 1.778x0.762 hole 0.508 rot 67.5: 1_40(-9.194,-22.172) 1_96(9.188,22.175)
  oval 1.778x0.762 hole 0.508 rot 70.7: 1_41(-7.936,-22.653) 1_97(7.93,22.655)
  oval 1.778x0.762 hole 0.508 rot 73.9: 1_42(-6.654,-23.062) 1_98(6.647,23.064)
  oval 1.778x0.762 hole 0.508 rot 77.1: 1_43(-5.351,-23.399) 1_99(5.344,23.401)
  oval 1.778x0.762 hole 0.508 rot 80.3: 1_44(-4.03,-23.662) 1_100(4.024,23.663)
  oval 1.778x0.762 hole 0.508 rot 83.5: 1_45(-2.697,-23.851)
  oval 1.778x0.762 hole 0.508 rot 86.8: 1_46(-1.356,-23.965) 1_102(1.349,23.965)
  oval 0.762x1.778 hole 0.508: 1_47(-0.01,-24.003) 1_103(0.003,24.003)
  oval 1.778x0.762 hole 0.508 rot 93.2: 1_48(1.336,-23.966) 1_104(-1.342,23.965)
  oval 1.778x0.762 hole 0.508 rot 96.4: 1_49(2.677,-23.853) 1_105(-2.684,23.852)
  oval 1.778x0.762 hole 0.508 rot 99.6: 1_50(4.01,-23.666) 1_106(-4.017,23.664)
  oval 1.778x0.762 hole 0.508 rot 102.8: 1_51(5.331,-23.404) 1_107(-5.338,23.402)
  oval 1.778x0.762 hole 0.508 rot 106: 1_52(6.635,-23.068)
  oval 1.778x0.762 hole 0.508 rot 109.3: 1_53(7.917,-22.66) 1_109(-7.924,22.657)
  oval 1.778x0.762 hole 0.508 rot 112.5: 1_54(9.175,-22.18) 1_110(-9.182,22.178)
  oval 1.778x0.762 hole 0.508 rot 115.7: 1_55(10.405,-21.631) 1_111(-10.411,21.628)
  oval 1.778x0.762 hole 0.508 rot 118.9: 1_56(11.601,-21.013) 1_112(-11.607,21.01)
  oval 1.778x0.762 hole 0.508 rot 128.5: 1_59(14.957,-18.773)
  oval 1.778x0.762 hole 0.508 rot 151: 1_66(21.002,-11.622)
  oval 1.778x0.762 hole 0.508 rot 173.5: 1_73(23.851,-2.701)
  oval 1.778x0.762 hole 0.508 rot 12.9: 1_79(23.401,5.341)
  oval 1.778x0.762 hole 0.508 rot 35.4: 1_86(19.577,13.889)
  oval 1.778x0.762 hole 0.508 rot 57.9: 1_93(12.772,20.323)
  oval 1.778x0.762 hole 0.508 rot 83.6: 1_101(2.691,23.852)
  oval 1.778x0.762 hole 0.508 rot 106.1: 1_108(-6.641,23.066)
  oval 1.778x0.889 hole 0.635 rot 125.3: 2(-14.768,20.822) 58(14.762,-20.826)
  oval 1.778x0.889 hole 0.635 rot 128.6: 3(-15.912,19.961)
  oval 1.778x0.889 hole 0.635 rot 131.8: 4(-17.006,19.038) 60(17.001,-19.042)
  oval 1.778x0.889 hole 0.635 rot 135: 5(-18.046,18.054) 61(18.041,-18.059)
  oval 1.778x0.889 hole 0.635 rot 138.2: 6(-19.03,17.014) 62(19.026,-17.019)
  oval 1.778x0.889 hole 0.635 rot 141.4: 7(-19.954,15.92) 63(19.95,-15.926)
  oval 1.778x0.889 hole 0.635 rot 144.6: 8(-20.816,14.776) 64(20.811,-14.782)
  oval 1.778x0.889 hole 0.635 rot 147.8: 9(-21.611,13.586) 65(21.608,-13.592)
  oval 1.778x0.889 hole 0.635 rot 151.1: 10(-22.339,12.353)
  oval 1.778x0.889 hole 0.635 rot 154.3: 11(-22.996,11.081) 67(22.993,-11.088)
  oval 1.778x0.889 hole 0.635 rot 157.5: 12(-23.581,9.774) 68(23.579,-9.781)
  oval 1.778x0.889 hole 0.635 rot 160.7: 13(-24.092,8.437) 69(24.09,-8.444)
  oval 1.778x0.889 hole 0.635 rot 163.9: 14(-24.528,7.073) 70(24.525,-7.08)
  oval 1.778x0.889 hole 0.635 rot 167.1: 15(-24.885,5.687) 71(24.884,-5.694)
  oval 1.778x0.889 hole 0.635 rot 170.3: 16(-25.165,4.283) 72(25.164,-4.29)
  oval 1.778x0.889 hole 0.635 rot 173.6: 17(-25.366,2.865)
  oval 1.778x0.889 hole 0.635 rot 176.8: 18(-25.486,1.438) 74(25.486,-1.446)
  oval 1.778x0.889 hole 0.635: 19(-25.527,0.007) 75(25.527,0)
  oval 1.778x0.889 hole 0.635 rot 3.2: 20(-25.487,-1.424) 76(25.487,1.431)
  oval 1.778x0.889 hole 0.635 rot 6.4: 21(-25.367,-2.851) 77(25.366,2.858)
  oval 1.778x0.889 hole 0.635 rot 9.6: 22(-25.168,-4.268) 78(25.166,4.276)
  oval 1.778x0.889 hole 0.635 rot 12.8: 23(-24.889,-5.673)
  oval 1.778x0.889 hole 0.635 rot 16.1: 24(-24.532,-7.059) 80(24.53,7.066)
  oval 1.778x0.889 hole 0.635 rot 19.3: 25(-24.097,-8.424) 81(24.095,8.43)
  oval 1.778x0.889 hole 0.635 rot 22.5: 26(-23.587,-9.761) 82(23.584,9.768)
  oval 1.778x0.889 hole 0.635 rot 25.7: 27(-23.002,-11.068) 83(22.999,11.075)
  oval 1.778x0.889 hole 0.635 rot 28.9: 28(-22.346,-12.341) 84(22.342,12.347)
  oval 1.778x0.889 hole 0.635 rot 32.1: 29(-21.619,-13.574) 85(21.615,13.58)
  oval 1.778x0.889 hole 0.635 rot 35.3: 30(-20.824,-14.765)
  oval 1.778x0.889 hole 0.635 rot 38.6: 31(-19.963,-15.909) 87(19.959,15.915)
  oval 1.778x0.889 hole 0.635 rot 41.8: 32(-19.04,-17.003) 88(19.035,17.009)
  oval 1.778x0.889 hole 0.635 rot 45: 33(-18.057,-18.044) 89(18.052,18.049)
  oval 1.778x0.889 hole 0.635 rot 48.2: 34(-17.016,-19.028) 90(17.011,19.033)
  oval 1.778x0.889 hole 0.635 rot 51.4: 35(-15.923,-19.952) 91(15.917,19.957)
  oval 1.778x0.889 hole 0.635 rot 54.6: 36(-14.779,-20.814) 92(14.773,20.818)
  oval 1.778x0.889 hole 0.635 rot 57.8: 37(-13.589,-21.609)
  oval 1.778x0.889 hole 0.635 rot 61.1: 38(-12.356,-22.337) 94(12.35,22.341)
  oval 1.778x0.889 hole 0.635 rot 64.3: 39(-11.085,-22.995) 95(11.078,22.998)
  oval 1.778x0.889 hole 0.635 rot 67.5: 40(-9.778,-23.58) 96(9.771,23.583)
  oval 1.778x0.889 hole 0.635 rot 70.7: 41(-8.44,-24.091) 97(8.434,24.094)
  oval 1.778x0.889 hole 0.635 rot 73.9: 42(-7.076,-24.526) 98(7.07,24.529)
  oval 1.778x0.889 hole 0.635 rot 77.1: 43(-5.69,-24.885) 99(5.683,24.886)
  oval 1.778x0.889 hole 0.635 rot 80.3: 44(-4.286,-25.165) 100(4.279,25.166)
  oval 1.778x0.889 hole 0.635 rot 83.5: 45(-2.868,-25.365)
  oval 1.778x0.889 hole 0.635 rot 86.8: 46(-1.442,-25.486) 102(1.435,25.487)
  oval 0.889x1.778 hole 0.635: 47(-0.011,-25.527) 103(0.004,25.527)
  oval 1.778x0.889 hole 0.635 rot 93.2: 48(1.421,-25.487) 104(-1.428,25.487)
  oval 1.778x0.889 hole 0.635 rot 96.4: 49(2.847,-25.368) 105(-2.854,25.367)
  oval 1.778x0.889 hole 0.635 rot 99.6: 50(4.265,-25.168) 106(-4.272,25.167)
  oval 1.778x0.889 hole 0.635 rot 102.8: 51(5.669,-24.889) 107(-5.676,24.888)
  oval 1.778x0.889 hole 0.635 rot 106: 52(7.056,-24.533)
  oval 1.778x0.889 hole 0.635 rot 109.3: 53(8.42,-24.098) 109(-8.427,24.096)
  oval 1.778x0.889 hole 0.635 rot 112.5: 54(9.758,-23.588) 110(-9.765,23.586)
  oval 1.778x0.889 hole 0.635 rot 115.7: 55(11.065,-23.004) 111(-11.072,23.001)
  oval 1.778x0.889 hole 0.635 rot 118.9: 56(12.338,-22.347) 112(-12.344,22.344)
  oval 1.778x0.889 hole 0.635 rot 128.5: 59(15.906,-19.965)
  oval 1.778x0.889 hole 0.635 rot 151: 66(22.335,-12.359)
  oval 1.778x0.889 hole 0.635 rot 173.5: 73(25.365,-2.872)
  oval 1.778x0.889 hole 0.635 rot 12.9: 79(24.887,5.68)
  oval 1.778x0.889 hole 0.635 rot 35.4: 86(20.82,14.771)
  oval 1.778x0.889 hole 0.635 rot 57.9: 93(13.583,21.613)
  oval 1.778x0.889 hole 0.635 rot 83.6: 101(2.861,25.366)
  oval 1.778x0.889 hole 0.635 rot 106.1: 108(-7.063,24.531)

## Nets
1.8V_1: J6.14 L15.2 R17.1
1.8V_2: J6.15 L7.2 R2.1
1.8V_3: J6.39 L8.2 R3.1
1.8V_4: J6.40 L10.2 R4.1
1.65VREF: C125.1 R179.2 R184.2 R189.2 R194.2 R195.1 R196.2
3V3: C34.1 C39.1 C40.1 C43.1 C45.1 C46.1 C128.1 C129.1 C130.1 C131.1 C132.1 C133.1 C134.1 C135.1 C136.1 C137.1 C138.1 C139.1 J8.4 L17.1 L23.1 L24.2 P1.1 P1.9 P1.23 P1.31 P1.36 P1.37 P1.40 P1.49 P1.51 P1.67 P1.72 P1.73 P1.82 P1.94 P1.103 P1.108 P1.109 P1.115 P1.117 P1.128 P1.139 P1.144 R198.1 R210.1 R211.1 R212.1 R215.1 R216.1 U5.2(VOUT) U5.4
5V_VCC: C12.2 C36.1 C37.1 C104.2 L22.1 U5.3
GND: C4.1 C7.2 C12.1 C13.2 C20.2 C22.1 C23.2 C24.1 C26.1 C27.2 C29.2 C33.2 C34.2 C35.1 C36.2 C37.2 C38.2 C39.2 C40.2 C43.2 C44.1 C45.2 C46.2 C50.1 C51.1 C52.1 C53.2 C54.2 C56.2 C57.2 C58.2 C59.2 C61.1 C62.2 C65.1 C66.1 C67.1 C68.1 C69.1 C70.1 C71.1 C72.1 C73.1 C74.1 C75.2 C78.2 C81.2 C84.1 C85.1 C86.1 C87.1 C88.1 C89.1 C90.1 C91.1 C92.1 C93.1 C98.2 C99.2 C100.2 C101.2 C102.2 C103.2 C104.1 C105.2 C106.2 C111.2 C112.2 C113.2 C114.2 C115.2 C116.2 C117.2 C118.2 C119.2 C120.2 C121.2 C122.2 C123.2 C124.2 C125.2 C126.2 C128.2 C129.2 C130.2 C131.2 C132.2 C133.2 C134.2 C135.2 C136.2 C137.2 C138.2 C139.2 D2.3 D3.3 IC1.7 IC2.5 IC3.5 IC4.5 IC5.5 IC6.5 IC7.5 IC8.5 IC9.5 IC10.5 IC11.5 IC12.5 IC13.5 J1.35 J1.36 J1.37 J1.38 J1.39 J1.40 J1.41 J1.42 J1.43 J1.44 J1.45 J1.46 J1.47 J1.48 J1.49 J1.50 J1.51 J1.52 J1.53 J1.54 J1.55 J1.56 J1.57 J1.58 J1.59 J1.60 J1.61 J1.62 J1.63 J1.64 J1.65 J1.66 J1.67 J1.68 J1.M1 J1.M2 J2.4 J2.6 J2.19 J2.25 J2.29 J2.44 J2.N1 J2.N2 J3.35 J3.36 J3.37 J3.38 J3.39 J3.40 J3.41 J3.42 J3.43 J3.44 J3.45 J3.46 J3.47 J3.48 J3.49 J3.50 J3.51 J3.52 J3.53 J3.54 J3.55 J3.56 J3.57 J3.58 J3.59 J3.60 J3.61 J3.62 J3.63 J3.64 J3.65 J3.66 J3.67 J3.68 J3.M1 J3.M2 J4.4 J4.6 J4.19 J4.25 J4.29 J4.44 J4.N1 J4.N2 J5.35 J5.36 J5.37 J5.38 J5.39 J5.40 J5.41 J5.42 J5.43 J5.44 J5.45 J5.46 J5.47 J5.48 J5.49 J5.50 J5.51 J5.52 J5.53 J5.54 J5.55 J5.56 J5.57 J5.58 J5.59 J5.60 J5.61 J5.62 J5.63 J5.64 J5.65 J5.66 J5.67 J5.68 J5.M1 J5.M2 J6.4 J6.6 J6.19 J6.25 J6.29 J6.44 J6.N1 J6.N2 J7.35 J7.36 J7.37 J7.38 J7.39 J7.40 J7.41 J7.42 J7.43 J7.44 J7.45 J7.46 J7.47 J7.48 J7.49 J7.50 J7.51 J7.52 J7.53 J7.54 J7.55 J7.56 J7.57 J7.58 J7.59 J7.60 J7.61 J7.62 J7.63 J7.64 J7.65 J7.66 J7.67 J7.68 J7.M1 J7.M2 J8.2 J8.10 P1.17 P1.30 P1.42 P1.48 P1.53 P1.61 P1.63 P1.68 P1.80 P1.83 P1.95 P1.97 P1.104 P1.106 P1.112 P1.116 P1.123 P1.125 P1.133 P1.137 P1.142 P1.145 R1.1 R9.1 R12.1 R13.1 R14.1 R15.1 R16.1 R18.1 R21.1 R22.1 R29.1 R30.1 R36.1 R37.1 R39.1 R41.1 R43.1 R44.1 R46.2 R48.2 R50.2 R52.2 R53.2 R57.2 R61.2 R62.2 R66.2 R67.2 R71.2 R72.2 R73.1 R75.1 R76.1 R78.1 R79.1 R81.1 R82.1 R84.1 R150.1 R153.1 R157.1 R161.1 R166.1 R178.1 R183.1 R188.1 R193.1 R197.1 R200.2 R209.1 R214.2 SW1.1 SW2.1 U2.2 U3.2 U4.2 U5.1 U6.2 U7.2 U10.2 U11.2 U12.2 U14.2 U15.1_5 U15.1_14 U15.1_17 U15.1_18 U15.1_25 U15.1_26 U15.1_29 U15.1_38 U15.1_43 U15.1_45 U15.1_49 U15.1_50 U15.1_54 U15.1_56 U15.1_61 U15.1_70 U15.1_73 U15.1_74 U15.1_81 U15.1_82 U15.1_85 U15.1_94 U15.1_99 U15.1_101 U15.1_105 U15.1_106 U15.1_110 U15.1_112 U15.5 U15.14 U15.17 U15.18 U15.25 U15.26 U15.29 U15.38 U15.43 U15.45 U15.49 U15.50 U15.54 U15.56 U15.61 U15.70 U15.73 U15.74 U15.81 U15.82 U15.85 U15.94 U15.99 U15.101 U15.105 U15.106 U15.110 U15.112 U16.5 U17.5 U18.5 U19.5 U24.1 U25.4 U26.4 U27.4 U28.4 U29.2 U30.2 U31.2 U32.2 U33.2 U34.2 U35.2 U36.2 U37.2
VCC3V3: C4.2 C7.1 C13.1 C20.1 C22.2 C23.1 C24.2 C26.2 C27.1 C29.1 C33.1 C35.2 C38.1 C44.2 C50.2 C51.2 C52.2 C53.1 C54.1 C56.1 C57.1 C58.1 C59.1 C61.2 C62.1 C75.1 C78.1 C81.1 C98.1 C102.1 IC1.14(VCC) IC2.10(V_CC) IC3.10(V_CC) IC4.10(V_CC) IC5.10(V_CC) IC6.10(V_CC) IC7.10(V_CC) IC8.10(V_CC) IC9.10(V_CC) IC10.10(V_CC) IC11.10(V_CC) IC12.10(V_CC) IC13.10(V_CC) L17.2 R6.2 R10.2 R11.2 R20.2 R23.2 R165.2 R195.2 U2.5(6) U3.5(6) U4.5(6) U6.5(6) U7.5(6) U10.5(6) U11.5(6) U12.5(6) U14.5(6) U16.8(VCC) U17.8(VCC) U18.8(VCC) U19.8(VCC) U24.3
VCCA: L23.2 P1.2 P1.34 P1.35 P1.71 P1.107 P1.143
VCCR1: C65.2 J2.20 U15.1 U15.1_1
VCCR2: C66.2 J2.21 U15.1_2 U15.2
VCCR3: C73.2 J2.22 U15.1_41 U15.41
VCCR4: C74.2 J2.23 U15.1_42 U15.42
VCCT1: C67.2 J2.45 U15.1_3 U15.3
VCCT2: C68.2 J2.46 U15.1_4 U15.4
VCCT3: C69.2 J2.47 U15.1_13 U15.13
VCCT4: C70.2 J2.48 U15.1_30 U15.30
VCCT5: C71.2 J4.45 U15.1_39 U15.39
VCCT6: C72.2 J4.46 U15.1_40 U15.40
0_86V_VREF: C120.1 R31.2 R171.2 R172.2 R173.2 R174.2
1_8V: C99.1 C101.1 L18.1 L19.1 L20.1 L21.1 U24.2(VOUT) U24.4
3_3V: C111.1 C112.1 C113.1 C114.1 C116.1 C117.1 C118.1 C119.1 C121.1 C122.1 C123.1 C124.1 U25.1(VCC) U26.1(VCC) U27.1(VCC) U28.1(VCC) U29.5(6) U30.5(6) U31.5(6) U32.5(6) U33.5(6) U34.5(6) U35.5(6) U36.5(6)
A_GND: C127.2 P1.4(REFGND_4) R209.2
AC/DC_CS: IC1.1 IC1.2 IC1.4 IC1.5 IC1.9 IC1.10 IC1.12 IC1.13 J1.34
ADC_REF: C127.1 P1.5
ADDR0_1: J3.6 U15.1_32 U15.32
ADDR0_2: J3.15 U15.1_11 U15.11
ADDR1_1: J3.7 U15.1_31 U15.31
ADDR1_2: J3.16 U15.1_12 U15.12
ANALOG0: R213.1
BIA_1: C100.1 L18.2 R68.1 R69.1
BIA_2: C103.1 L19.2 R63.1 R64.1
BIA_3: C105.1 L20.2 R58.1 R59.1
BIA_4: C106.1 L21.2 R54.1 R55.1
BURNIN_1: J3.2 U15.1_36 U15.36
BURNIN_2: J3.11 U15.1_7 U15.7
CKO_ALIVE: J10.3
CKO_WORD: J10.1
CLK_INI: P1.27 R28.1 R30.2
CONFIG_DONE: P1.138 R199.1
CP_TXN1: C109.2 J1.10
CP_TXN2: C110.2 J1.2
CP_TXP1: J1.9 R238.2
CP_TXP2: J1.1 R237.2
END_TEST: P1.7
FPGA_RX1: P1.124 R241.2
FPGA_RX2: P1.130 R240.2
FPGA_TXP1: P1.101 R239.2
FPGA_TXP2: P1.105 R236.2
IMON: J3.8 U15.1_22 U15.22
INT_1: J3.1 U15.1_37 U15.37
INT_2: J3.10 U15.1_6 U15.6
LASER1: IC7.4 U15.1_55 U15.55
LASER1__TOFPGA: P1.58
LASER1_ACTEST: C42.1 IC7.3 L13.2
LASER1_DCTEST: IC7.2 J1.29
LASER1_OUT: J1.17 R167.1
LASER1_T: C42.2 R149.2
LASER1_TOFPGA: R227.1
LASER2: IC7.6 U15.1_44 U15.44
LASER2__TOFPGA: P1.56 R226.1
LASER2_ACTEST: C41.2 IC7.7 L1.2
LASER2_DCTEST: IC7.8 J1.30
LASER2_OUT: J1.18 R168.1
LASER2_T: C41.1 R156.2
NCONFIG: P1.129 R215.2 SW1.2
PDA1: R47.2 R192.1
PDA1_ACIN: IC13.3 J3.18 U10.1 U10.4
PDA1_DATAIN: R191.2
PDA1_DCIN: IC13.2 J3.21
PDA1_FPGA: P1.44 R230.2
PDA1_IN: IC13.4 U15.1_52 U15.52
PDA2: R177.1
PDA2_ACIN: IC13.7 J3.27 U14.1 U14.4
PDA2_DATAIN: R176.2
PDA2_DCIN: IC13.8 J3.26
PDA2_FPGA: P1.46 R231.2
PDA2_IN: IC13.6 U15.1_47 U15.47
PDA3: R45.2
PDC1_1: J3.31 U15.1_51 U15.51
PDC1_2: J3.32 U15.1_53 U15.53
PDC2_1: J3.29 U15.1_46 U15.46
PDC2_2: J3.30 U15.1_48 U15.48
PLLOUT_N: P1.32
PLLOUT_P: P1.33
POW_RESET_N: J10.7 R216.2 SW2.2
RESET_N: J10.5
RSSI_1: J3.5 U15.1_33 U15.33
RSSI_2: J3.14 U15.1_10 U15.10
RX1: J1.6 R70.2
RX2: J1.4 R65.2
RX2+: P1.96
RX2-: P1.98
RXN1: C83.1 IC11.6 U15.1_20 U15.20
RXN1_DCTEST: IC11.8 J3.25
RXN2: C80.1 IC9.6 U15.1_23 U15.23
RXN2_DCTEST: IC9.8 J3.28
RXP1: C82.1 IC11.4 U15.1_19 U15.19
RXP1_DCTEST: IC11.2 J3.20
RXP2: C79.1 IC9.4 U15.1_24 U15.24
RXP2_DCTEST: IC9.2 J3.23
SCL_1: J3.4 U15.1_34 U15.34
SCL_2: J3.13 U15.1_9 U15.9
SDA_1: J3.3 U15.1_35 U15.35
SDA_2: J3.12 U15.1_8 U15.8
SET1_AC/DC_CS1: IC1.3 IC4.1 IC6.1 IC7.1
SET1_AC/DC_CS2: IC1.11 IC9.1 IC11.1 IC13.1
SET2_AC/DC_CS1: IC1.6 IC2.1 IC3.1 IC5.1
SET2_AC/DC_CS2: IC1.8 IC8.1 IC10.1 IC12.1
SET2_ADDR0_1: J7.6 U15.1_88 U15.88
SET2_ADDR0_2: J7.15 U15.1_67 U15.67
SET2_ADDR1_1: J7.7 U15.1_87 U15.87
SET2_ADDR1_2: J7.16 U15.1_68 U15.68
SET2_BURNIN_1: J7.2 U15.1_92 U15.92
SET2_BURNIN_2: J7.11 U15.1_63 U15.63
SET2_CP_TXN1: C107.2 J5.28
SET2_CP_TXN2: C108.2 J5.2
SET2_CP_TXP1: J5.27 R235.2
SET2_CP_TXP2: J5.1 R232.2
SET2_FPGA_RX1: P1.132 R242.2
SET2_FPGA_RX2: P1.140 R243.2
SET2_FPGA_TXP1: P1.92 R234.2
SET2_FPGA_TXP2: P1.99 R233.2
SET2_IMON: J7.8 U15.1_78 U15.78
SET2_INT_1: J7.1 U15.1_93 U15.93
SET2_INT_2: J7.10 U15.1_62 U15.62
SET2_LASER1: IC5.4 U15.1_111 U15.111
SET2_LASER1_ACTEST: C32.2 IC5.3 L3.2
SET2_LASER1_DCTEST: IC5.2 J5.29
SET2_LASER1_OUT: J5.17 R169.1
SET2_LASER1_T: C32.1 R152.2
SET2_LASER1_TOFPGA: P1.75 R224.1
SET2_LASER2: IC5.6 U15.1_100 U15.100
SET2_LASER2_ACTEST: C30.1 IC5.7 L2.2
SET2_LASER2_DCTEST: IC5.8 J5.30
SET2_LASER2_OUT: J5.18 R170.1
SET2_LASER2_T: C30.2 R160.2
SET2_LASER2_TOFPGA: P1.77 R225.1
SET2_PDA1: R49.2 R180.1 U34.1
SET2_PDA1_ACIN: IC12.3 J7.17 U11.1 U11.4
SET2_PDA1_DATAIN: R181.2
SET2_PDA1_DCIN: IC12.2 J7.21
SET2_PDA1_FPGA: P1.50 R228.2
SET2_PDA1_IN: IC12.4 U15.1_108 U15.108
SET2_PDA2: R51.2 R187.1
SET2_PDA2_ACIN: IC12.7 J7.27 U12.1 U12.4
SET2_PDA2_DATAIN: R186.2
SET2_PDA2_DCIN: IC12.8 J7.26
SET2_PDA2_FPGA: P1.54 R229.2
SET2_PDA2_IN: IC12.6 U15.1_103 U15.103
SET2_PDC1_1: J7.31 U15.1_107 U15.107
SET2_PDC1_2: J7.32 U15.1_109 U15.109
SET2_PDC2_1: J7.29 U15.1_102 U15.102
SET2_PDC2_2: J7.30 U15.1_104 U15.104
SET2_RSSI_1: J7.5 U15.1_89 U15.89
SET2_RSSI_2: J7.14 U15.1_66 U15.66
SET2_RX1: J5.11 R60.2
SET2_RX2: J5.4 R56.2
SET2_RXN1: C77.1 IC10.6 U15.1_76 U15.76
SET2_RXN1_DCTEST: IC10.8 J7.25
SET2_RXN2: C10.1 IC8.6 U15.1_79 U15.79
SET2_RXN2_DCTEST: IC8.8
SET2_RXP1: C76.1 IC10.4 U15.1_75 U15.75
SET2_RXP1_DCTEST: IC10.2 J7.20
SET2_RXP2: C11.1 IC8.4 U15.1_80 U15.80
SET2_RXP2_DCTEST: IC8.2 J7.23
SET2_SCL_1: J7.4 U15.1_90 U15.90
SET2_SCL_2: J7.13 U15.1_65 U15.65
SET2_SDA_1: J7.3 U15.1_91 U15.91
SET2_SDA_2: J7.12 U15.1_64 U15.64
SET2_TXN1: C19.1 IC3.6 U15.1_72 U15.72
SET2_TXN2: C15.1 IC2.6 U15.1_83 U15.83
SET2_TXN2_DCTEST: IC2.8 J5.24
SET2_TXP1: C18.1 IC3.4 U15.1_71 U15.71
SET2_TXP1_DCTEST: IC3.2 IC3.8 J5.25 J5.26
SET2_TXP2: C14.1 IC2.4 U15.1_84 U15.84
SET2_TXP2_DCTEST: IC2.2 J5.23
SET2_VCCR1: C84.2 J6.20 U15.1_57 U15.57
SET2_VCCR2: C85.2 J6.21 U15.1_58 U15.58
SET2_VCCR3: C92.2 J6.22 U15.1_97 U15.97
SET2_VCCR4: C93.2 J6.23 U15.1_98 U15.98
SET2_VCCT1: C86.2 J6.45 U15.1_59 U15.59
SET2_VCCT2: C87.2 J6.46 U15.1_60 U15.60
SET2_VCCT3: C88.2 J6.47 U15.1_69 U15.69
SET2_VCCT4: C89.2 J6.48 U15.1_86 U15.86
SET2_VCCT5: C90.2 J4.20 U15.1_95 U15.95
SET2_VCCT6: C91.2 J4.21 U15.1_96 U15.96
SET2_VTHERM: J7.9 U15.1_77(VTHERM) U15.77
STARTE_TEST: P1.6
TCK: D2.2(CATHODE2) J8.1 P1.18 R214.1
TDI: D3.1 J8.9 P1.19 R211.2
TDO: D2.1 J8.3 P1.20
TMS: D3.2(CATHODE2) J8.5 P1.16 R210.2
TX1_RESULT: P1.8 P1.10 P1.11 P1.12
TXN1: C8.1 IC6.6 U15.1_16 U15.16
TXN2: C6.1 IC4.6 U15.1_27 U15.27
TXN2_DCTEST: IC4.8 J1.24
TXP1: C9.1 IC6.4 U15.1_15 U15.15
TXP1_DCTEST: IC6.2 IC6.8 J1.25 J1.26
TXP2: C3.1 IC4.4 U15.1_28 U15.28
TXP2_DCTEST: IC4.2 J1.23
VMON: J10.9
VREF: C115.1 R154.2 R162.2 R163.2 R164.2 R165.1 R166.2
VTHERM: J3.9 U15.1_21 U15.21
N14945031: IC13.9 R44.2
N14946823: R23.1 R26.2 U7.3
N14946875: R171.1 U7.1 U7.4
N14947105: C48.2 R31.1 U10.3
N14948326: C60.2 R174.1 U14.3
N14951359: L1.1 L4.2
N14951377: L4.1 L7.1 L9.2 R2.2 R5.2
N14951499: L9.1 R5.1 U2.1 U2.4
N14951507: R6.1 R12.2 U2.3
N14951647: L14.1 L15.1 L16.2 R17.2 R19.2
N14951735: L16.1 R19.1 U6.1 U6.4
N14951777: R20.1 R21.2 U6.3
N14952398: IC4.9 R15.2
N14953371: IC9.9 R37.2
N14954064: IC6.9 R18.2
N14954674: IC7.9 R22.2
N14955810: IC11.9 R41.2
N14965357: J3.19
N14965369: J3.22
N14965377: J3.24
N14965413: J3.33
N14965417: J3.34
N14992621: J7.18
N14992633: J7.19
N14992669: J7.22
N14992693: J7.24
N14992741: J7.28
N14992809: J7.33
N14992821: J7.34
N14999681: L2.1 L6.2
N14999699: L6.1 L10.1 L12.2 R4.2 R8.2
N14999889: L12.1 R8.1 U4.1 U4.4
N14999897: R11.1 R14.2 U4.3
N15000486: L5.1 L8.1 L11.2 R3.2 R7.2
N15000646: L11.1 R7.1 U3.1 U3.4
N15000688: R10.1 R13.2 U3.3
N15001446: IC2.9 R1.2
N15001662: IC3.9 R9.2
N15002757: IC5.9 R16.2
N15005367: C49.2 R172.1 U11.3
N15006178: C47.2 R173.1 U12.3
N15007097: IC8.9 R36.2
N15007281: IC10.9 R39.2
N15007473: IC12.9 R43.2
N15012328: J5.13
N15012332: J5.14
N15014027: J1.13
N15014045: J1.14
N15021278: J6.2 J6.27 L22.2
N15091904: C60.1 R45.1 R46.1
N15092194: C48.1 R47.1 R48.1
N15092366: C49.1 R49.1 R50.1
N15092547: C47.1 R51.1 R52.1
N15135903: C10.2 R55.2 U16.7
N15135907: C11.2 R54.2 U16.6
N15135931: R57.1 U16.2 U16.3
N15136181: C77.2 R58.2 U17.7
N15136185: C76.2 R59.2 U17.6
N15136209: R61.1 U17.2 U17.3
N15137201: C80.2 R63.2 U18.7
N15137205: C79.2 R64.2 U18.6
N15137237: R66.1 U18.2 U18.3
N15137497: C83.2 R68.2 U19.7
N15137501: C82.2 R69.2 U19.6
N15137533: R71.1 U19.2 U19.3
N15195355: R234.1 R235.1 U25.2
N15195359: C18.2 R73.2 R74.2 U25.8
N15195363: C19.2 C107.1 R74.1 R75.2 U25.7
N15195367: R236.1 R237.1 U27.2
N15195583: C9.2 R82.2 R83.2 U28.8
N15195587: C8.2 C109.1 R83.1 R84.2 U28.7
N15196799: C15.2 C108.1 R77.1 R78.2 U26.7
N15196810: C14.2 R76.2 R77.2 U26.8
N15197032: C3.2 R79.2 R80.2 U27.8
N15197047: C6.2 C110.1 R80.1 R81.2 U27.7
N15197384: R238.1 R239.1 U28.2
N15255747: R146.2 R149.1 R150.2 U29.3
N15255755: R146.1 R167.2 R227.2 U29.1
N15257032: R151.2 R152.1 R153.2 U30.3
N15257040: R151.1 R169.2 R224.2 U30.1
N15257441: R155.2 R156.1 R157.2 U31.3
N15257449: R155.1 R168.2 R226.2 U31.1
N15258133: R159.2 R160.1 R161.2 U32.3
N15258141: R159.1 R170.2 R225.2 U32.1
N15264281: R175.2 R176.1 R178.2 R231.1 U33.3
N15264289: R175.1 R177.2 U33.1
N15265016: R180.2 R181.1 R183.2 R228.1 U34.3
N15265523: R185.2 R186.1 R188.2 R229.1 U35.3
N15265531: R185.1 R187.2 U35.1
N15266986: R190.2 R191.1 R193.2 R230.1 U36.3
N15266994: R190.1 R192.2 U36.1
N15280198: D1.A R198.2 R199.2
N15280398: D1.C(CATHODE) R200.1
N15280956: P1.136 R212.2
N15281138: P1.3 R213.2
N15285744: C126.1 L24.1 R27.1 U37.4(VDD)
N15285946: R28.2 U37.3
N15286776: J10.2 P1.62
N15286786: J10.4 P1.64
N15286802: J10.6 P1.65
N15286870: J10.8 P1.66
N15286902: J10.10 P1.69
N15299804: R232.1 R233.1 U26.2
N15300514: R65.1 R240.1 U18.1
N15300656: R70.1 R241.1 U19.1
N15300676: R60.1 R242.1 U17.1
N15300812: R56.1 R243.1 U16.1
N149468910: R26.1 R29.2
N149516230: L13.1 L14.2
N150004660: L3.1 L5.2
N151358693: R53.1 U16.4
N151361473: R62.1 U17.4
N151371693: R67.1 U18.4
N151374653: R72.1 U19.4
N152558073: R163.1 U29.4
N152570863: R154.1 U30.4
N152574953: R164.1 U31.4
N152581873: R162.1 U32.4
N152643693: R179.1 U33.4
N152651123: R184.1 U34.4
N152656193: R189.1 U35.4
N152670823: R194.1 U36.4
N152679860: R196.1 R197.2
N152858921: R27.2 U37.1

Pads without a net: IC2 3 7; IC3 3 7; IC4 3 7; IC6 3 7; IC8 3 7; IC9 3 7; IC10 3 7; IC11 3 7; J1 3 5 7 8 11 12 15 16 19 20 21 22 27 28 31 32 33; J2 1 2 3 5 7 8 9 10 11 12 13 14 15 16 17 18 24 26 27 28 30 31 32 33 34 35 36 37 38 39 40 41 42 43 49 50; J3 17; J4 1 2 3 5 7 8 9 10 11 12 13 14 15 16 17 18 22 23 24 26 27 28 30 31 32 33 34 35 36 37 38 39 40 41 42 43 47 48 49 50; J5 3 5 6 7 8 9 10 12 15 16 19 20 21 22 31 32 33 34; J6 1 3 5 7 8 9 10 11 12 13 16 17 18 24 26 28 30 31 32 33 34 35 36 37 38 41 42 43 49 50; J8 6 7 8; P1 13 14 15 21 22 24 25 26 28 29 38 39 41 43 45 47 52 55 57 59 60 70 74 76 78 79 81 84 85 86 87 88 89 90 91 93 100 102 110 111 113 114 118 119 120 121 122 126 127 131 134 135 141; U25 3 5 6; U26 3 5 6; U27 3 5 6; U28 3 5 6

## Via types
v1: diameter 0.61, hole 0.33, TOP to BOTTOM, 74 vias

## Routing (per net, layer and track width the routed paths; a pad name or vN(x,y) marks a point on that pad's centre or on a via; arc(x,y) is an arc through that point)
3V3: length 34.2
  TOP w0.305: v1(101.65,19.95) C45.1 100.39,19.95 100.25,20.1 P1.82 ; P1.109 97.07,36.09 96.93,36.23 C43.1 v1(96.13,36.81) ; P1.103 100.19,30.6 100.21,30.62 C139.1 ; P1.108 100.22,33.1 100.23,33.09 C134.1 v1(100.81,33.84) ; P1.94 100.29,26.1 100.39,26.19 C138.1 ; L24.2 v1(70.57,22.08) ; P1.117 93.07,36.24 93.02,36.28 C131.1 93.82,36.86 v1(94.07,36.61) P1.115
  TOP w0.381: J8.4 66.6,2.45 66.63,2.42 R212.1
  TOP w0.813: 7.25,94.97 U5.4 ; U5.4 8.53,96.77 ; U5.4 9.81,94.97 ; U5.4 8.53,93.17 ; 6.99,92.25 L17.1 6.07,92.93 ; 5.9,93.76 C40.1 ; C40.1 6.53,94.39 ; C40.1 5.9,95.02 ; 5.94,95.43 C39.1 ; C39.1 5.94,96.68 ; C39.1 6.57,96.05 ; U5.2 15.66,94.97 ; U5.2 13.1,94.97 ; U5.2 14.38,94.32
5V_VCC: length 12.9
  TOP w0.813: C12.2 15,100.24 ; C12.2 15,98.98 ; C12.2 15.63,99.61 ; 16.97,96.95 C37.1 16.34,96.32 ; C104.2 15.62,101.2 ; C104.2 14.99,100.58 ; C104.2 14.99,101.83 ; 14.38,96.62 U5.3 ; U5.3 15.66,97.27 ; U5.3 14.38,97.92 ; C36.1 17.21,99.48 ; C36.1 17.21,97.48 ; C36.1 16.46,98.48 ; L22.1 17.15,101.85 ; L22.1 17.15,100 ; L22.1 16.47,100.93
